# Altium PCB esp8266.PcbDoc
Units mm, origin at the board's own origin, x right, y up, seen from the top; angles counter-clockwise.
Board outline 37.46 x 28.07 mm, 2 copper layers (Top Layer, Bottom Layer); 9 components, 8 nets, 42 pads, 0 vias.
Unrouted connection lines stored in the file: 16.
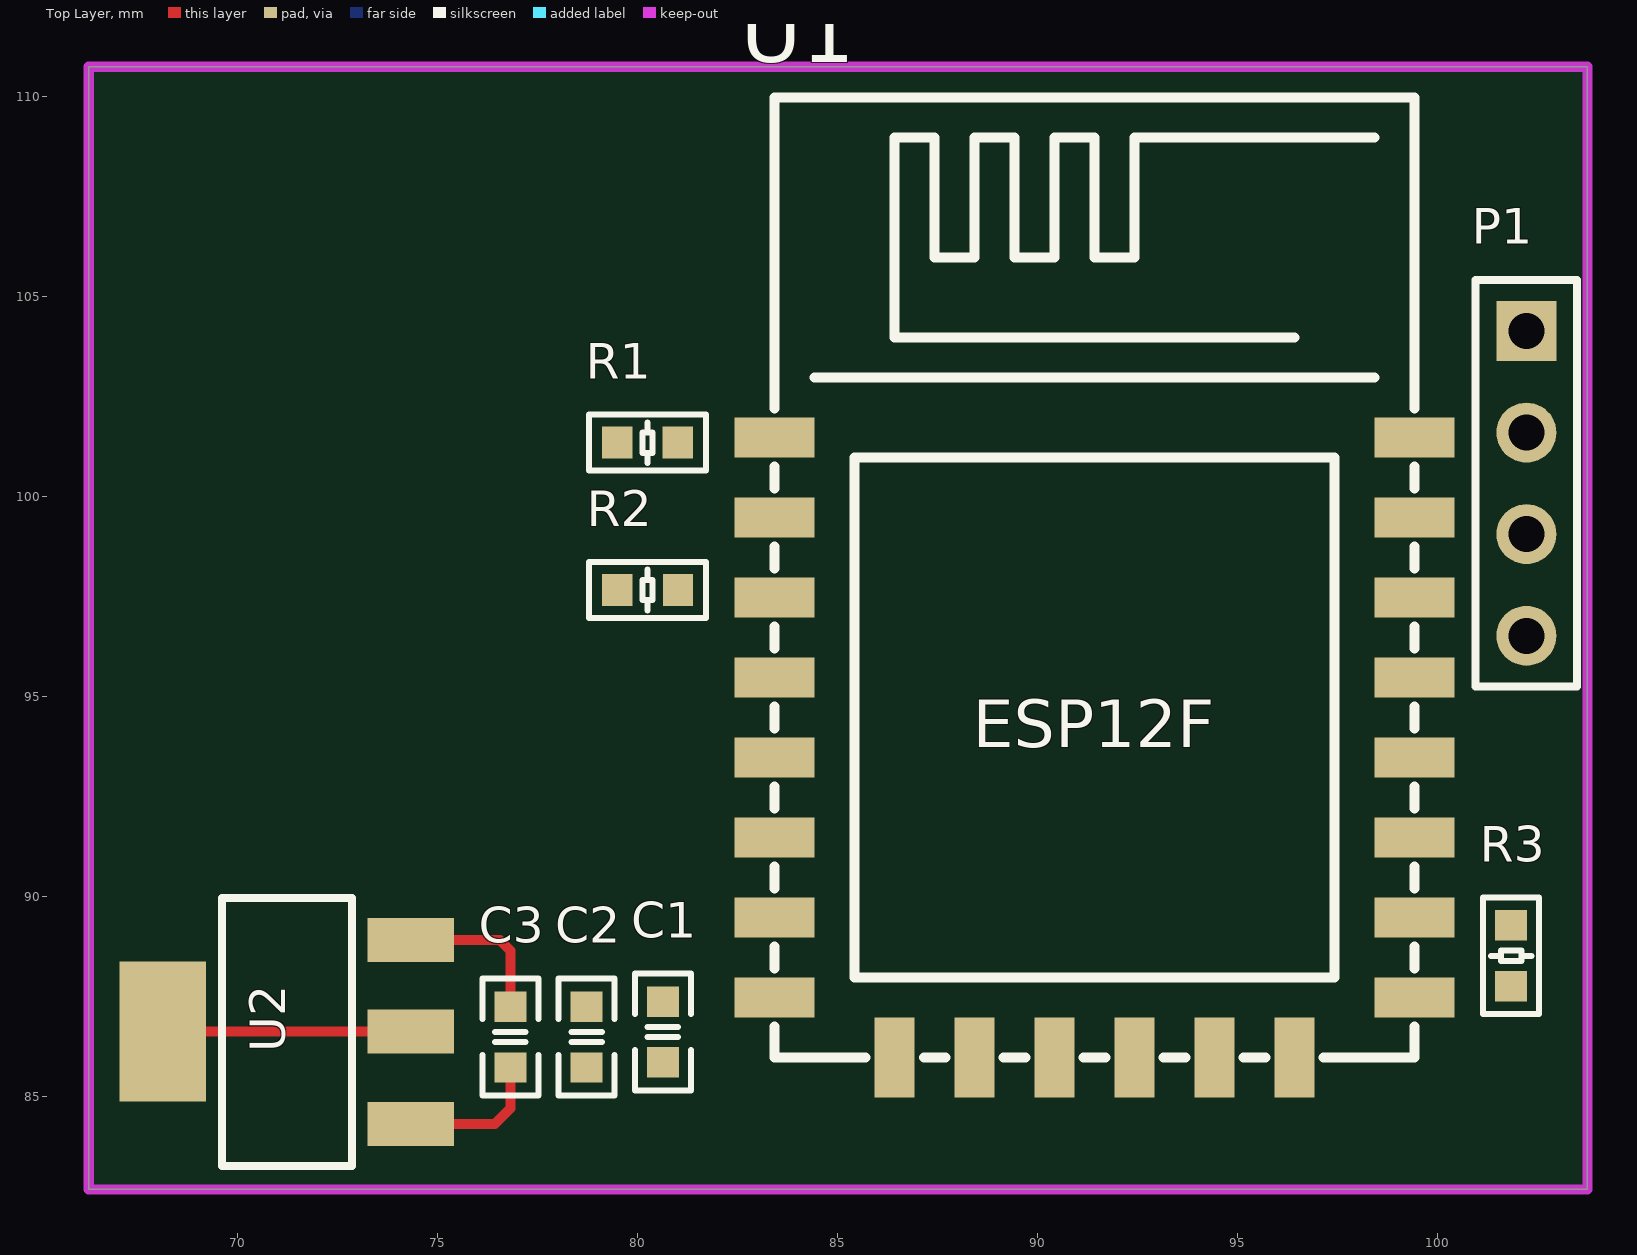
[diagram p0: Top Layer view]
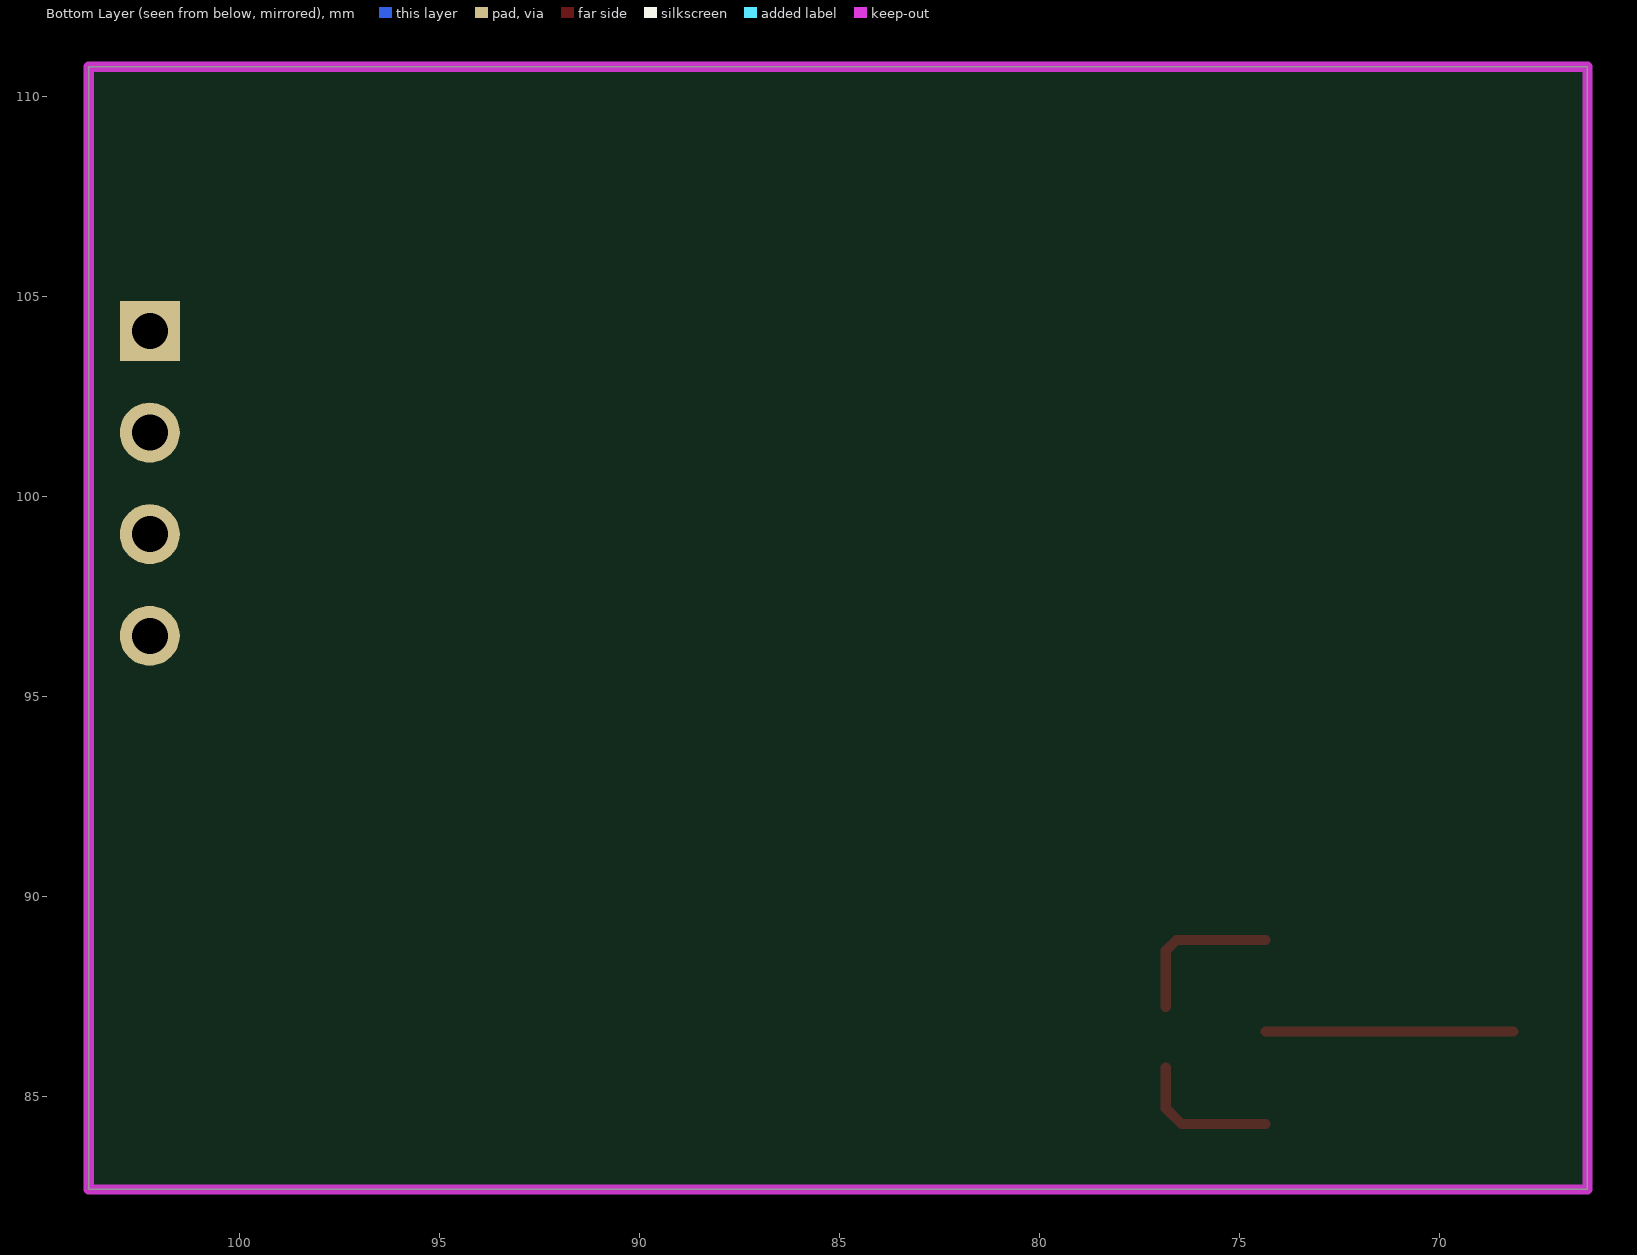
[diagram p1: Bottom Layer view, seen from below]

## Layer stack, top to bottom
Top Solder: solder mask 0.0102, Solder Resist, Dk 3.5
Top Layer: signal copper 0.0356
Dielectric 1: dielectric 0.32, FR-4, Dk 4.8
Bottom Layer: signal copper 0.0356
Bottom Solder: solder mask 0.0102, Solder Resist, Dk 3.5

## Board outline
66.294,82.677 66.294,110.744 103.759,110.744 103.759,82.677

## Design rules (kind name [scope] priority, off if disabled: settings)
Clearance [All] p1: gap=0.254 ignorepadtopadclearanceinfootprint=FALSE except(0: Arc-Hole Track-Hole SMDPad-Hole THPad-Hole Via-Hole Fill-Hole Poly-Hole Region-Hole Text-Hole)
PolygonConnect [All] p1: connectstyle=Relief reliefconductorwidth=0.254 reliefentries=4 polygonreliefangle="90 Angle" airgapwidth=0.254
RoomDefinition esp8266 [InComponentClass('esp8266')] p1: confinementstyle=ConfineIn formatcopy=TRUE lockcomponents=FALSE outline 0,0 50.8,0 50.8,25.4 0,25.4
RoutingVias [All] p1: holewidth=0.711 width=1.27 viastyle="Through Hole" minholewidth=0.711 minwidth=1.27 maxholewidth=0.711 maxwidth=1.27
SolderMaskExpansion [All] p1: expansion=0.102
Width [All] p1: maxlimit=0.254 minlimit=0.254 preferedwidth=0.254
30 further rules are at their usual default settings.

## Classes and differential pairs
component class esp8266: C6 C7 P1 R9 R10 R11 U2 U3

## Components (designator, comment, footprint, x,y, rotation, side; value= is the part's Value field where it differs from the comment)
C1 "10uF/0603" C0603 80.645,86.614 r90 top
C2 "100nF/0603" C0603 78.74,86.487 r90 top
C3 "1uF/16V/0603" C0603 76.835,86.487 r90 top
P1 "Header 4" HDR1X4 102.235,104.14 r270 top
R1 "10K/0603" R0603 80.262,101.346 r0 top
R2 "10K/0603" R0603 80.264,97.663 r0 top
R3 "10K/0603" R0603 101.854,88.519 r90 top
U1 "ESP-12F" WIFIM-SMD_ESP-12F-ESP8266MOD 91.44,93.726 r0 top
U2 "AMS1117-3.3" SOT-223_L6.5-W3.5-P2.30-LS7.0-BR 71.245,86.614 r0 top

## Footprints (in the part's own frame and the unit in brackets; to place one, negate y for a bottom-side part, rotate by r counter-clockwise, add the part's x,y. Pads: shape width x height; smd on the part's side, far side on the other; paste and mask are expansions set on the pad)
C0603 [mm]
  rect 0.76x0.8 smd: 1(-0.76,0) 2(0.76,0)
  silkscreen extent -1.46,-0.7 1.46,0.7
HDR1X4 [mm] "Connector; Header; 4 Position"
  rect 1.5x1.5 hole 0.9: 1(0,0)
  round 1.5 hole 0.9: 2(2.54,0) 3(5.08,0) 4(7.62,0)
  silkscreen extent -1.27,-1.27 8.89,1.27
R0603 [mm]
  rect 0.76x0.8 smd: 1(-0.76,0) 2(0.76,0)
  silkscreen extent -1.46,-0.7 1.46,0.7
SOT-223_L6.5-W3.5-P2.30-LS7.0-BR [mil]
  rect 85x43 smd: 1(122,-90.5) 2(122,0.5) 3(122,90.5)
  rect 85x138 smd: 4(-122,0.5)
  silkscreen extent -64,-132 64,132
WIFIM-SMD_ESP-12F-ESP8266MOD [mm]
  rect 2x1 smd: 1(-8.002,7.751) 2(-8.002,5.751) 3(-8.002,3.751) 4(-8.002,1.751) 5(-8.002,-0.25) 6(-8.002,-2.25) 7(-8.002,-4.249) 8(-8.001,-6.249) 9(7.999,-6.249) 10(8,-4.249) 11(8.002,-2.25) 12(8.001,-0.25) 13(8,1.751) 14(8.001,3.751) 15(8,5.751) 16(8.001,7.751)
  rect 1x2 smd: 17(-5,-7.751) 18(-3.002,-7.749) 19(-1.003,-7.749) 20(0.998,-7.749) 21(2.997,-7.749) 22(4.997,-7.75)
  silkscreen extent -8,-7.75 8,16.25

## Part data
C1 C2 C3: library part CAP
P1: "Header, 4-Pin", LatestRevisionDate=17-Jul-2002, LatestRevisionNote="Re-released for DXP Platform.", Publisher="Altium Limited"
R1 R2 R3: library part RES
U1: library part ESP-12F(ESP8266MOD), BOM_Manufacturer=Ai-Thinker, BOM_Manufacturer Part=ESP-12F(ESP8266MOD), BOM_Supplier=LCSC, BOM_Supplier Part=C82891, spicePre=U, spiceSymbolName=ESP-12F(ESP8266MOD)
U2: BOM_LCSC Assembly=Yes, BOM_Manufacturer=SK, BOM_Manufacturer Part=AMS1117-3.3, BOM_Supplier=LCSC, BOM_Supplier Part=C165482, Contributor=LCSC, SMT Type=Extend, spicePre=U, spiceSymbolName=AMS1117-3.3_C165482

## Nets (pads, with @x,y where several pads share a name; then routed paths per layer and width w, separated by ;. In a path a pad name is that pad's centre, name@x,y a point inside that pad or via, vN(x,y) a via of type N, cw(c..) or ccw(c..) an arc to the next point about the centre after c; other vN are vias at no path point)
+12V: C3.2 U2.3 | length 4
  Top Layer w0.254: U2.3 76.568,88.913 76.835,88.646 C3.2
GND: C1.1 C2.1 C3.1 P1.1 R3.1 U1.9 U2.1 | length 3.7
  Top Layer w0.254: U2.1 76.441,84.315 76.835,84.709 C3.1
NetR1_2: R1.2 U1.1
NetR2_2: R2.2 U1.3
NetR3_2: R3.2 U1.10
RXD: P1.3 U1.15
TXD: P1.2 U1.16
VCC: C1.2 C2.2 P1.4 R1.1 R2.1 U1.8 U2.2 U2.4 | length 6.2
  Top Layer w0.254: U2.4 U2.2
pads on no net: U1.2 U1.4 U1.5 U1.6 U1.7 U1.11 U1.12 U1.13 U1.14 U1.17 U1.18 U1.19 U1.20 U1.21 U1.22

## Keep-outs
Keep-Out Layer:
  the board outline again, w0.254

## Text inside footprints (layer, text, board x,y; h text height)
U1: Top Overlay "ESP12F" at 88.392,93.345 h2.03